# EAGLE board Niedrigregallager (EAGLE 9.5.2)

Size 160 x 100 mm. Coordinates in mm from the lower left corner, seen from the top.
Outline: 0,0 160,0 160,100 0,100 0,0
Copper layers (1*16): Top 0.035mm / dielectric 1.5mm / Bottom 0.035mm
Design rules "default": minimum track width 6mil, minimum drill 0.35mm, track to track 6mil, track to pad 6mil, pad to pad 6mil, via to via 6mil, smd to smd 6mil, copper to edge 40mil, drill to drill 6mil, minimum pad ring 10mil, minimum via ring 8mil, stop-mask expansion 4mil, vias tented up to drill 0mil, thermal gap 10mil

## Footprints (pad centres in the part's own frame; a part is rotated, then mirrored left to right if it is on the bottom)
1X04 = drill 1.016 long: 1 -3.81,0; 2 -1.27,0; 3 1.27,0; 4 3.81,0
2X20 = drill 1.016 octagon: 1 -24.13,-1.27; 2 -24.13,1.27; 3 -21.59,-1.27; 4 -21.59,1.27; 5 -19.05,-1.27; 6 -19.05,1.27; 7 -16.51,-1.27; 8 -16.51,1.27; 9 -13.97,-1.27; 10 -13.97,1.27; 11 -11.43,-1.27; 12 -11.43,1.27; 13 -8.89,-1.27; 14 -8.89,1.27; 15 -6.35,-1.27; 16 -6.35,1.27; 17 -3.81,-1.27; 18 -3.81,1.27; 19 -1.27,-1.27; 20 -1.27,1.27; 21 1.27,-1.27; 22 1.27,1.27; 23 3.81,-1.27; 24 3.81,1.27; 25 6.35,-1.27; 26 6.35,1.27; 27 8.89,-1.27; 28 8.89,1.27; 29 11.43,-1.27; 30 11.43,1.27; 31 13.97,-1.27; 32 13.97,1.27; 33 16.51,-1.27; 34 16.51,1.27; 35 19.05,-1.27; 36 19.05,1.27; 37 21.59,-1.27; 38 21.59,1.27; 39 24.13,-1.27; 40 24.13,1.27
1X02 = drill 1.016 long: 1 -1.27,0; 2 1.27,0
0207/10 = drill 0.813 octagon: 1 -5.08,0; 2 5.08,0
A4988 = drill 0.6 long: 1A 13.97,-11.43; 1B 13.97,-13.97; 2A 13.97,-8.89; 2B 13.97,-6.35; /RESET 1.27,-11.43; /SLEEP 1.27,-13.97; DIR 1.27,-19.05; EN 1.27,-1.27; GND 13.97,-3.81; GND2 13.97,-19.05; MS1 1.27,-3.81; MS2 1.27,-6.35; MS3 1.27,-8.89; STEP 1.27,-16.51; VDD 13.97,-16.51; VMO 13.97,-1.27

## Placement (x,y rotation side)
JP1  MotX  [1X04]  -19.05,36.83 0 top  (outside the outline)
JP2  MotY  [1X04]  -30.48,36.83 0 top  (outside the outline)
JP3  MotZ  [1X04]  -41.91,36.83 0 top  (outside the outline)
JP4  Raspberry Pi  [2X20]  -39.37,27.94 0 top  (outside the outline)
JP5  Power  [1X04]  -53.34,36.83 0 top  (outside the outline)
JP6  HomeX  [1X02]  -27.94,44.45 0 top  (outside the outline)
JP7  HomeY  [1X02]  -35.56,44.45 0 top  (outside the outline)
JP8  HomeZ  [1X02]  -43.18,44.45 0 top  (outside the outline)
JP9  InputSense  [1X02]  -20.32,44.45 0 top  (outside the outline)
JP10  [1X04]  -19.05,50.8 0 top  (outside the outline)
JP11  E-Stop  [1X02]  -50.8,44.45 0 top  (outside the outline)
JP12  [1X02]  -60.96,-3.81 0 top  (outside the outline)
R1  [0207/10]  -31.75,49.53 0 top  (outside the outline)
R2  [0207/10]  -44.45,49.53 0 top  (outside the outline)
R3  [0207/10]  -57.15,49.53 0 top  (outside the outline)
R4  [0207/10]  -19.05,55.88 0 top  (outside the outline)
R5  [0207/10]  -31.75,55.88 0 top  (outside the outline)
U$1  A4988  [A4988]  -29.21,21.59 0 top  (outside the outline)
U$2  A4988  [A4988]  -45.72,21.59 0 top  (outside the outline)
U$3  A4988  [A4988]  -62.23,21.59 0 top  (outside the outline)

## Library data of the parts
JP1-JP12 = pinhead
R1-R5 = rcl; SPICEPREFIX: R
U$1-U$3 = A4899

## Nets
+5V: JP4.2 JP5.3 R5.2 U$1.VDD U$2.VDD U$3.VDD
+12V: JP5.4 U$1.VMO U$2.VMO U$3.VMO
GND: JP4.6 JP5.1 JP6.2 JP7.2 JP8.2 JP9.2 JP11.2 JP12.2 R1.1 R2.1 R3.1 R4.1 U$1.GND U$1.GND2 U$2.GND U$2.GND2 U$3.GND U$3.GND2
INP: JP4.16 JP9.1 R4.2
MOT_EN: JP11.1 R5.1 U$1.EN U$2.EN U$3.EN
N$1: U$3./RESET U$3./SLEEP
N$2: U$2./RESET U$2./SLEEP
N$3: U$1./RESET U$1./SLEEP
N$4: JP1.1 U$1.2B
N$5: JP1.2 U$1.2A
N$6: JP1.3 U$1.1A
N$7: JP1.4 U$1.1B
N$8: JP2.1 U$2.2B
N$9: JP2.2 U$2.2A
N$10: JP2.3 U$2.1A
N$11: JP2.4 U$2.1B
N$12: JP3.1 U$3.2B
N$13: JP3.2 U$3.2A
N$14: JP3.3 U$3.1A
N$15: JP3.4 U$3.1B
POWER: JP5.2 JP12.1
SCL: JP4.5 JP10.4
SDA: JP4.3 JP10.3
XDIR: JP4.37 U$1.DIR
XH: JP4.8 JP6.1 R1.2
XSTEP: JP4.35 U$1.STEP
YDIR: JP4.33 U$2.DIR
YH: JP4.10 JP7.1 R2.2
YSTEP: JP4.31 U$2.STEP
ZDIR: JP4.38 U$3.DIR
ZH: JP4.12 JP8.1 R3.2
ZSTEP: JP4.36 U$3.STEP

## Tracks (layer width: path | path; a pad name or v marks a point on that pad's centre or on a via)
+5V  (5 unrouted)
+12V  (3 unrouted)
GND  (17 unrouted)
INP  (2 unrouted)
MOT_EN  (4 unrouted)
N$1  (1 unrouted)
N$2  (1 unrouted)
N$3  (1 unrouted)
N$4  (1 unrouted)
N$5  (1 unrouted)
N$6  (1 unrouted)
N$7  (1 unrouted)
N$8  (1 unrouted)
N$9  (1 unrouted)
N$10  (1 unrouted)
N$11  (1 unrouted)
N$12  (1 unrouted)
N$13  (1 unrouted)
N$14  (1 unrouted)
N$15  (1 unrouted)
POWER  (1 unrouted)
SCL  (1 unrouted)
SDA  (1 unrouted)
XDIR  (1 unrouted)
XH  (2 unrouted)
XSTEP  (1 unrouted)
YDIR  (1 unrouted)
YH  (2 unrouted)
YSTEP  (1 unrouted)
ZDIR  (1 unrouted)
ZH  (2 unrouted)
ZSTEP  (1 unrouted)